# Altium PCB PCB1.PcbDoc (part 2 of 2)
Units mm, origin at the board's own origin, x right, y up, seen from the top; angles counter-clockwise.
Board outline 152.4 x 101.6 mm, 2 copper layers (Top Layer, Bottom Layer); 186 components, 0 nets, 752 pads, 762 vias.
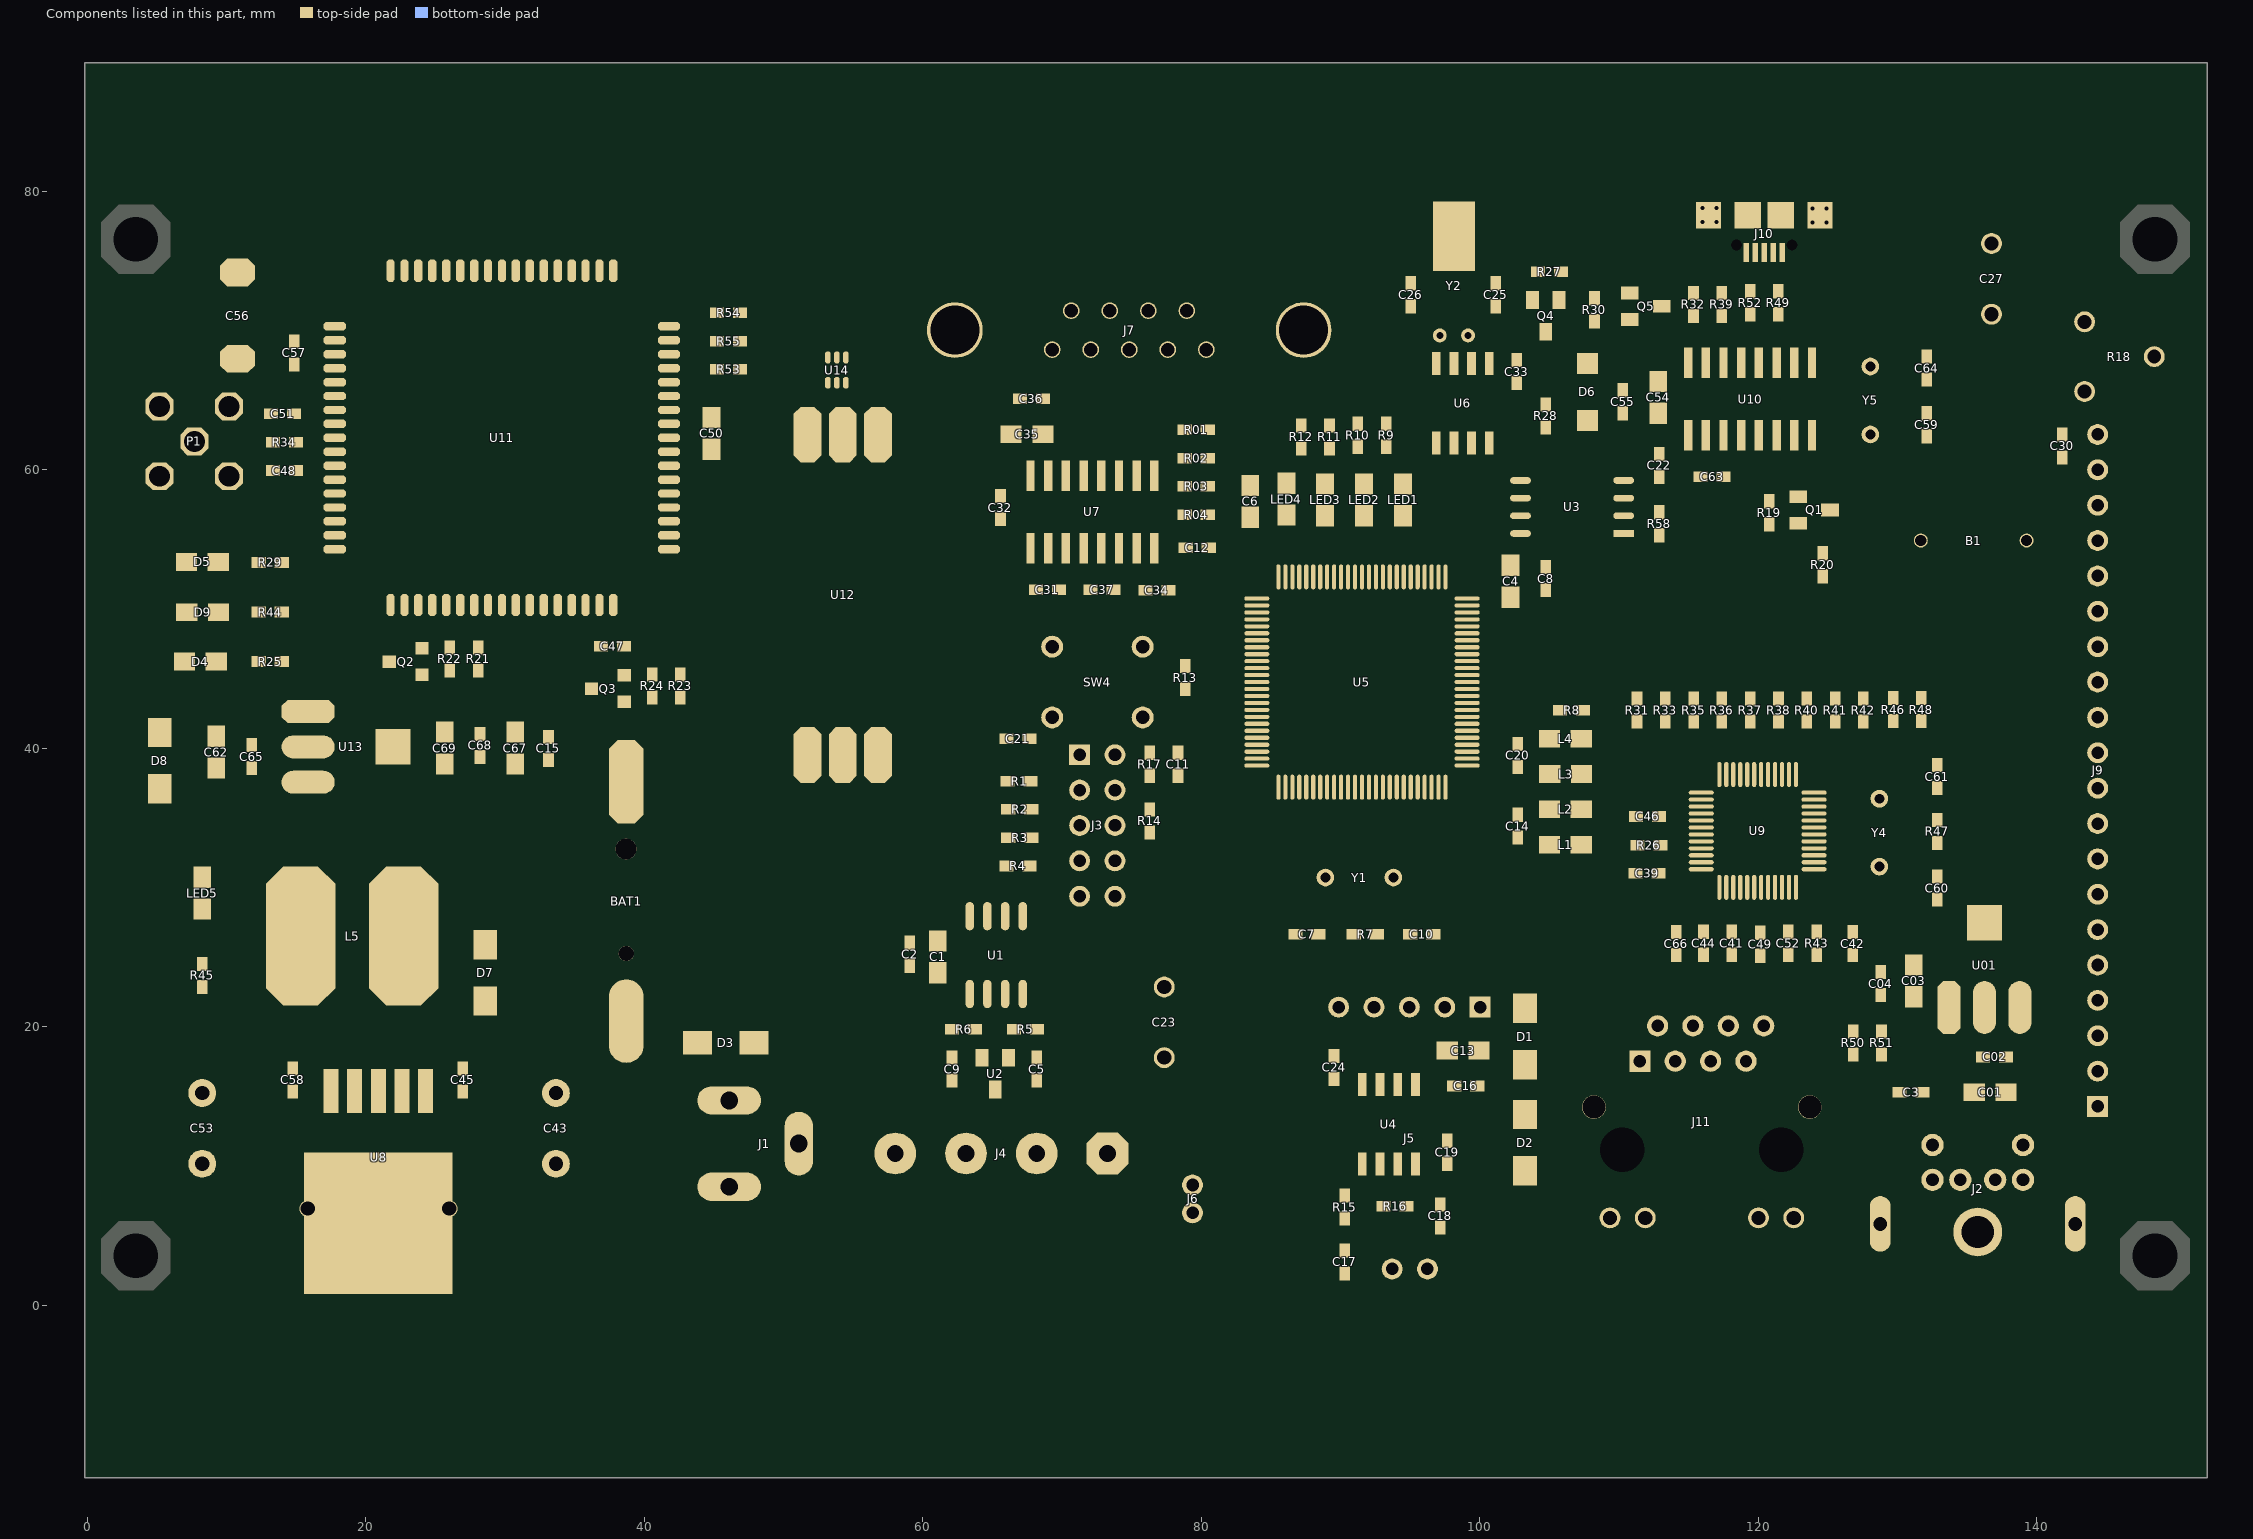
[diagram p2: the components of this part, seen from the top]

## Via types
v1: diameter 0.5, hole 0.3, Top Layer to Bottom Layer, tented both sides, 749 vias
v2: diameter 0.4, hole 0.3, Top Layer to Bottom Layer, tented both sides, 8 vias
v3: diameter 1, hole 0.7, Top Layer to Bottom Layer, tented both sides, 5 vias

## Nets (pads, with @x,y where several pads share a name; then routed paths per layer and width w, separated by ;. In a path a pad name is that pad's centre, name@x,y a point inside that pad or via, vN(x,y) a via of type N, cw(c..) or ccw(c..) an arc to the next point about the centre after c; other vN are vias at no path point) (continued)
copper on no net: | length 4498
  Top Layer w0.254: 28.105,47.282 30.214,47.282 35.65,41.846 43.829,41.846 46.775,44.793 v1(69.838,44.793) ; 29.771,50.28 v1(29.771,52.235) ; 30.771,50.28 30.771,52.106 31.484,52.819 38.673,52.819 41.75,49.742 83.98,49.742 ; v1(31.865,52.26) 38.52,52.26 41.539,49.242 83.98,49.242 ; 42.587,45.288 42.854,45.555 v1(70.804,45.555) ; 53.821,68.06 53.821,69.377 ; 63.361,27.928 63.361,30.017 63.682,30.338 67.174,30.338 69.813,27.699 80.71,27.699 81.497,28.486 81.497,40.475 82.264,41.242 83.98,41.242 ; 67.171,27.928 68.01,27.089 81.167,27.089 82.005,27.927 82.005,40.068 82.679,40.742 83.98,40.742 ; 72.81,59.555 72.81,57.581 73.482,56.909 79.106,56.909 ; 73.794,34.442 74.289,33.947 76.29,33.947 80.303,33.947 80.938,34.582 80.938,43.472 81.708,44.242 83.98,44.242 ; 74.08,59.555 74.08,57.911 74.482,57.509 77.017,57.509 77.535,58.026 77.535,60.414 77.943,60.822 78.799,60.822 ; 75.782,42.202 75.782,40.17 76.29,39.662 ; 78.649,56.909 78.799,56.758 78.799,56.534 ; v1(78.83,42.761) 78.83,44.234 ; v1(80.354,35.42) v1(80.354,46.418) ; 80.45,56.758 81.651,56.758 v1(81.726,56.832) ; 80.45,60.822 80.499,60.871 v1(81.624,60.871) ; 80.474,58.814 v1(82.208,58.814) ; 80.525,62.928 v1(81.649,62.928) ; v1(82.05,50.742) 83.98,50.742 ; v1(82.582,39.638) 82.978,39.242 83.98,39.242 ; v1(82.626,50.242) 83.98,50.242 ; v1(82.834,43.742) 83.98,43.742 ; v1(83.631,54.394) 84.901,54.394 85.53,53.765 85.53,52.292 ; 83.98,35.979 83.98,38.742 ; 83.98,41.742 v1(85.558,41.742) ; 83.98,42.242 86.312,42.242 87.466,43.396 87.466,47.663 v1(86.856,48.273) ; 83.98,42.742 85.866,42.742 86.856,43.733 v1(86.856,47.358) ; 85.279,55.238 85.279,54.741 86.03,53.99 86.03,52.292 ; 85.53,37.192 85.53,39.402 v1(87.034,40.907) ; v1(85.536,49.67) 85.608,49.742 99.08,49.742 ; 86.03,37.192 86.03,39.14 v1(86.882,39.992) ; 86.11,56.737 86.11,55.013 86.374,54.75 90.997,54.75 91.53,54.216 91.53,52.292 ; v1(86.171,49.085) 86.327,49.242 99.08,49.242 ; 86.53,37.192 86.53,38.828 v1(87.771,40.068) ; 87.03,37.192 87.03,38.515 v1(87.644,39.129) ; 87.03,52.292 87.03,50.995 87.568,50.457 v1(88.558,50.457) ; 87.53,37.192 87.53,38.202 v1(88.533,39.205) ; 88.53,52.292 v1@88.53,53.556 ; 88.882,56.68 88.882,55.613 89.238,55.258 91.225,55.258 92.03,54.453 92.03,52.292 ; 89.03,52.292 v1@89.03,54.216 ; 90.03,37.192 90.03,39.886 ; v1(90.03,50.965) 90.03,52.292 ; v1@90.53,35.766 90.53,37.192 ; v1(90.53,50.355) 90.53,52.292 ; 90.936,26.639 88.396,26.639 88.904,27.147 88.904,30.703 91.03,32.829 91.03,37.192 ; 91.03,52.292 91.03,50.906 91.555,50.381 v1(97.474,50.381) ; 91.53,37.192 91.53,32.957 93.784,30.703 93.784,27.855 95,26.639 92.587,26.639 ; 91.682,56.68 91.682,55.436 92.53,54.588 92.53,52.292 ; 92.03,37.192 v1(92.03,38.494) 92.03,45.928 v1(94.603,48.501) ; 93.03,52.292 93.03,55.228 94.482,56.68 ; 93.53,52.292 93.53,54.413 94.248,55.131 95.162,55.131 96.864,56.832 96.864,61.902 ; v1@94.03,35.877 94.03,37.192 ; 94.03,52.292 94.03,54.1 94.603,54.673 95.416,54.673 98.134,57.391 98.134,61.902 ; v1@94.53,35.217 94.53,37.192 ; 94.53,52.292 94.53,53.889 94.883,54.242 95.696,54.242 99.404,57.95 99.404,61.902 ; 95.03,36.948 95.03,34.613 96.077,33.566 102.706,33.566 ; 95.042,71.727 95.042,71.71 97.118,69.634 98.134,68.618 98.134,67.602 ; 95.53,37.192 95.53,34.951 96.254,34.226 101.715,34.226 102.706,35.217 ; 96.03,37.192 96.03,35.365 96.585,34.811 100.166,34.811 102.706,37.351 102.706,38.646 ; 96.03,52.292 96.03,53.839 101.411,59.22 102.916,59.22 ; 96.53,37.192 v1(96.53,38.494) ; 96.53,52.292 v1(96.53,53.552) ; v1(96.839,35.369) 99.785,35.369 101.309,36.893 101.309,40.043 101.563,40.297 102.706,40.297 ; 97.03,37.192 v1(97.03,39.338) ; 97.03,52.292 97.03,53.874 101.106,57.95 102.916,57.95 ; v1(97.245,40.043) 97.546,39.742 99.08,39.742 ; v1@97.296,40.742 99.08,40.742 ; v1@97.296,41.742 99.08,41.742 ; 97.475,21.396 97.53,21.451 ; 97.53,37.192 97.53,36.39 97.882,36.038 v1(99.482,36.038) ; 97.53,52.292 v1(97.53,53.525) ; v1(97.855,42.71) 97.575,42.989 97.575,43.853 97.964,44.242 99.08,44.242 ; v1(97.859,40.242) 99.08,40.242 ; v1@97.86,41.242 99.08,41.242 ; 98.484,38.742 99.08,38.742 98.871,38.533 v1(98.871,36.638) ; 99.08,39.242 100.478,39.242 100.499,39.263 ; 99.08,43.242 100.647,43.242 101.538,44.132 108.015,44.132 109.081,45.199 135.624,45.199 137.148,43.675 137.148,33.541 141.212,29.477 141.212,14.084 140.196,13.068 138.622,13.068 137.656,12.103 137.656,9.651 137.001,8.996 ; 99.08,43.742 100.258,43.742 101.182,44.666 107.634,44.666 108.853,45.885 135.878,45.885 137.707,44.056 137.707,33.871 141.822,29.756 141.822,13.525 139.793,11.496 139.001,11.496 ; 99.08,45.242 107.372,45.242 108.65,46.52 136.31,46.52 138.876,43.955 138.876,34.988 144.362,29.502 ; 99.08,45.742 107.084,45.742 108.421,47.079 128.639,47.079 ; 99.08,46.242 106.721,46.242 108.065,47.587 131.408,47.587 ; 99.08,46.742 106.357,46.742 107.761,48.146 137.631,48.146 141.111,44.666 141.111,40.373 144.362,37.122 ; 99.08,47.242 105.957,47.242 107.42,48.704 138.037,48.704 141.822,44.92 141.822,42.202 144.362,39.662 ; 99.08,47.742 105.551,47.742 107.072,49.263 138.52,49.263 142.457,45.326 142.457,44.107 144.362,42.202 ; 99.08,48.242 105.094,48.242 106.597,49.746 139.206,49.746 144.21,44.742 144.362,44.742 ; 99.08,48.742 104.687,48.742 106.225,50.28 140.043,50.28 143.041,47.282 144.362,47.282 ; 99.08,50.242 100.686,50.242 100.982,50.538 ; 99.404,67.602 99.404,69.38 99.15,69.634 99.15,69.739 101.138,71.727 ; v1(104.225,58.961) 104.225,62.517 104.738,63.03 ; v1(104.484,42.71) 105.754,42.71 ; v1(105.017,58.915) 105.017,61.735 106.821,63.538 107.718,63.538 ; 107.278,38.118 107.298,38.138 ; v1(107.532,58.331) 107.532,56.096 108.218,55.41 110.326,55.41 109.589,55.41 ; v1(108.294,58.356) 108.294,57.163 108.777,56.68 110.326,56.68 109.564,56.68 ; 109.339,6.264 109.339,5.267 110.555,4.051 124.118,4.051 126.81,6.743 126.81,17.997 126.81,17.641 ; v2(109.691,20.079) 109.691,36.081 110.41,36.799 115.895,36.799 ; 111.284,41.898 111.284,39.841 111.767,39.358 118.447,39.358 118.695,39.109 118.695,38.099 ; 111.489,17.514 110.123,18.88 110.123,35.903 110.519,36.299 115.895,36.299 ; 111.875,6.264 113.402,4.737 123.178,4.737 125.668,7.226 125.668,31.686 125.055,32.299 123.995,32.299 ; 112.833,31.001 113.672,31.001 114.47,31.799 115.895,31.799 117.421,31.799 118.195,31.025 118.195,29.999 118.195,28.456 116.55,26.81 116.059,26.81 ; 112.882,34.038 113.482,34.038 114.721,32.799 115.895,32.799 ; 112.891,35.299 114.314,35.299 ; 112.96,33.033 113.773,33.033 114.507,32.299 115.895,32.299 ; 113.316,41.263 113.316,41.898 113.316,40.476 114.002,39.79 118.777,39.79 119.195,39.371 119.195,38.099 ; 115.348,41.517 115.348,41.898 115.348,40.679 115.729,40.298 119.006,40.298 119.695,39.608 119.695,38.099 ; 115.895,34.299 v1(117.221,34.299) ; 115.895,34.799 v1(117.682,34.799) ; 115.895,35.299 114.314,35.299 ; 115.895,35.799 117.743,35.799 117.982,36.038 ; 116.227,62.462 v1(116.227,64.419) ; 116.421,38.099 117.195,38.099 117.195,36.725 117.582,36.338 ; 116.482,28.438 117.482,28.438 117.695,28.651 117.695,29.999 ; 117.082,33.299 115.895,33.299 114.921,33.299 114.314,33.906 114.314,35.299 ; 117.37,71.031 118.767,69.634 118.767,67.662 ; 117.422,31.801 117.422,33.259 ; 117.497,59.474 118.018,59.474 118.767,60.223 118.767,62.462 ; 117.497,62.462 v1(117.497,63.97) ; 117.63,41.648 117.38,41.898 117.38,41.212 117.786,40.806 119.209,40.806 119.387,40.628 119.59,40.425 120.195,39.819 120.195,38.099 ; 118.091,26.81 118.091,27.623 119.195,28.727 119.195,29.999 119.195,32.799 ; v1(118.482,31.938) 118.695,31.725 118.695,29.999 ; 119.402,71.158 119.402,70.718 v1(120.282,69.838) ; 119.402,72.809 119.402,73.458 120.418,74.474 120.418,75.595 ; 119.412,41.898 119.412,41.263 120.695,39.98 120.695,38.099 120.695,39.625 ; 120.003,6.264 120.003,7.378 121.045,8.42 123.966,8.42 125.236,9.69 125.236,30.899 124.835,31.299 123.995,31.299 ; 120.037,62.462 120.037,63.993 v1(120.282,64.238) ; 120.123,26.739 120.123,28.03 120.695,28.602 120.695,29.999 ; v1(120.182,31.738) 120.195,31.725 120.195,29.999 ; v1(120.982,69.838) 121.434,70.29 121.434,71.158 ; 121.068,75.595 121.068,73.175 121.434,72.809 ; v1(121.082,64.238) 121.307,64.013 121.307,62.462 ; 121.195,29.999 121.195,32.799 ; 121.195,39.363 121.195,38.099 121.195,41.649 121.444,41.898 ; 121.695,29.999 121.695,28.235 122.155,27.776 122.155,26.81 ; 121.695,38.099 121.695,40.143 123.451,41.898 123.476,41.898 ; 121.782,34.238 122.721,33.299 123.995,33.299 ; 122.195,29.999 122.195,28.802 124.187,26.81 ; 122.195,38.099 122.195,39.83 123.019,40.653 125,40.653 125.508,41.161 125.508,41.898 ; 122.482,32.799 123.995,32.799 125.236,32.799 ; v2(122.559,36.299) 123.995,36.299 ; 122.577,62.462 122.577,63.533 126.446,67.402 128.038,67.402 128.746,68.11 132.102,68.11 ; v2(122.588,35.299) 123.995,35.299 ; 122.695,38.831 122.695,38.099 122.695,39.416 123.425,40.145 v2(124.448,40.145) 127.108,40.145 127.54,40.577 127.54,41.898 ; v2(122.823,35.799) 123.995,35.799 ; v2(122.859,34.799) 123.995,34.799 125.369,34.799 125.66,35.091 125.66,38.647 126.143,39.129 130.766,39.129 131.706,40.069 131.706,41.937 131.706,42.127 ; 123.847,62.462 123.847,62.803 125.782,64.738 127.382,64.738 128.038,64.082 128.038,62.522 128.165,62.395 132.102,62.395 ; 123.995,33.799 127.993,33.799 128.683,33.11 ; 123.995,34.299 128.023,34.299 128.683,34.96 ; 123.995,36.799 v2(123.995,37.325) 123.995,39.09 124.543,39.637 128.708,39.637 129.674,40.603 129.674,41.937 129.674,42.127 ; 126.81,19.648 128.842,19.648 ; v2(127.903,15.989) 128.842,16.929 128.842,17.997 ; 128.683,31.484 128.683,33.11 ; 128.683,36.364 128.683,34.96 ; 131.332,47.079 128.639,47.079 ; 132.849,30.773 132.849,33.186 132.772,33.11 128.683,33.11 ; 132.849,37.123 132.849,34.837 132.726,34.96 128.683,34.96 ; 133.364,47.587 131.408,47.587 ; 144.362,32.042 139.663,36.741 139.663,44.056 136.64,47.079 128.639,47.079 ; 144.362,34.582 140.4,38.544 140.4,44.336 137.148,47.587 131.408,47.587
  Top Layer w0.265: 131.823,66.738 132.102,66.459 132.102,64.046
  Top Layer w0.3: 46.871,67.192 46.953,67.11 54.229,67.11 54.471,67.352 54.471,68.06
  Top Layer w0.4: 41.771,66.28 43.815,66.28 44.407,65.688 53.007,65.688 53.171,65.852 53.171,66.231 53.167,66.231 ; 51.647,62.558 51.701,62.504 51.701,65.682 ; 53.821,66.231 v1(53.821,65.088) 53.821,62.924 ; 53.857,62.888 53.821,62.924 ; 53.957,62.788 53.821,62.924 ; 54.241,62.504 54.241,64.154 ; 54.471,66.231 54.471,65.624 55.014,65.081 56.781,63.314 56.781,62.504 ; 54.735,68.06 54.471,68.06 57.535,68.06 58.707,66.888 v1(58.707,62.7) ; 56.781,39.504 58.023,39.504 58.707,40.188 v1(58.707,41.516)
  Top Layer w0.5: 6.973,46.216 6.973,53.232 ; 7.679,62.02 7.735,61.964 ; 8.243,22.848 8.243,15.228 8.356,15.341 14.751,15.341 14.751,13.144 15.307,12.588 18.707,12.588 19.191,13.072 19.191,15.376 ; 9.251,40.85 11.156,40.85 11.791,40.215 ; 9.259,46.216 12.307,46.216 ; 9.395,53.368 9.435,53.328 12.307,53.328 ; 9.423,49.772 12.307,49.772 ; 13.958,46.216 14.235,46.216 20.707,52.688 23.671,52.688 24.771,51.588 24.771,50.28 ; 13.958,49.772 16.191,49.772 21.307,54.888 21.307,69.288 20.315,70.28 17.771,70.28 ; 13.958,53.328 13.958,55.439 14.799,56.28 17.771,56.28 ; 14.751,16.992 16.603,16.992 17.491,16.104 17.491,15.376 ; 21.673,46.216 21.771,46.314 21.771,50.28 ; 24.023,45.266 27.74,45.266 28.055,45.581 ; 24.023,47.166 24.089,47.232 26.023,47.232 ; 26.943,16.992 26.943,20.212 28.563,21.832 ; 36.205,44.272 36.771,44.838 36.771,50.28 ; 38.523,47.32 38.555,47.288 38.555,45.222 38.621,45.288 40.555,45.288 ; 38.555,43.322 42.272,43.322 42.587,43.637 ; 38.698,37.596 41.864,34.43 59.653,34.43 61.837,36.614 v1@61.837,39.637 ; 41.771,62.28 43.115,62.28 43.939,61.456 44.819,61.456 ; 41.771,65.28 43.281,65.28 44.819,63.742 ; 41.771,67.28 45.132,67.28 45.22,67.192 ; 41.771,68.28 44.276,68.28 45.22,69.224 ; 41.771,69.28 43.244,69.28 45.22,71.256 ; 46.871,69.224 v1(50.307,69.224) ; 46.871,71.256 v1(48.375,71.256) ; 65.571,56.447 68.619,56.447 69,56.066 69,54.355 ; 66.079,37.63 66.13,37.579 ; 66.13,33.566 66.13,35.598 66.13,37.579 ; 67.654,31.534 69.826,29.362 71.254,29.362 ; 67.654,40.678 68.798,40.678 69.282,41.162 69.282,42.202 ; 67.73,54.355 67.73,51.748 68.111,51.367 ; 67.73,37.63 70.606,37.63 71.254,36.982 ; 67.781,33.566 69.59,33.566 71.254,31.902 ; 68.619,65.083 68.619,62.543 69,62.162 69,59.555 ; 69.762,51.367 70.27,51.875 70.27,54.355 ; 70.27,59.555 70.27,63.183 74.817,67.73 74.817,68.618 ; 71.254,39.522 70.77,39.038 66.482,39.038 66.13,38.686 66.13,37.579 ; 71.54,54.355 71.54,51.875 72.048,51.367 ; 71.54,59.555 71.54,61.685 77.585,67.73 77.585,68.618 ; 72.81,54.355 72.81,52.992 73.699,52.103 73.699,51.367 ; 74.08,54.355 74.08,53.17 75.731,51.519 75.731,51.367 ; 78.799,56.758 78.799,58.79 ; 78.799,60.822 78.799,62.854 ; 80.532,54.394 v1(83.631,54.394) 83.631,56.451 83.504,56.578 ; 86.11,59.023 87.168,60.081 87.168,61.515 ; 88.882,58.966 89.2,59.284 89.2,61.515 ; 89.855,21.396 91.705,19.546 94.095,19.546 95.365,18.276 95.365,15.848 ; 91.232,61.642 91.232,59.416 91.682,58.966 ; 93.264,61.642 93.264,60.184 94.482,58.966 ; 93.264,63.293 93.264,65.5 93.664,65.9 100.039,65.9 100.674,66.535 ; 99.81,15.736 99.81,18.149 99.937,18.276 ; 100.674,61.902 v1(100.674,65.265) ; 100.674,67.602 100.674,66.535 ; 101.138,73.378 102.061,73.378 102.634,72.805 102.634,67.862 ; 102.198,50.838 104.23,50.838 104.738,51.346 ; 102.634,66.211 100.998,66.211 100.674,66.535 ; 102.706,33.566 103.214,33.058 104.992,33.058 ; 102.706,35.217 103.087,35.598 104.992,35.598 ; 102.706,38.646 103.214,38.138 105.012,38.138 ; 102.706,40.297 103.087,40.678 104.992,40.678 ; 103.781,72.174 103.781,73.825 104.162,74.206 ; 104.67,64.681 104.67,69.824 104.733,69.888 ; 105.686,72.174 108.099,72.174 108.226,72.301 ; 105.813,74.206 v1(107.25,74.206) ; 107.718,67.622 109.434,69.338 112.482,69.338 113.052,69.908 113.052,71.729 113.052,72.308 113.426,72.682 115.338,72.682 ; 108.226,70.65 v1(109.482,70.65) 110.639,70.65 110.766,70.777 ; 110.258,64.046 112.798,64.046 112.798,61.193 ; 110.258,65.697 110.893,66.332 112.798,66.332 113.627,66.332 114.957,67.662 v1(114.957,69.638) 114.957,70.65 115.338,71.031 ; 110.326,55.41 112.739,55.41 112.866,55.283 ; 110.326,57.95 112.866,57.95 ; 110.326,59.22 110.326,60.719 110.732,61.125 112.866,61.125 114.906,61.125 ; 110.766,72.682 112.122,74.038 117.082,74.038 117.37,73.75 117.37,72.682 ; 112.866,56.934 112.866,57.95 ; 112.866,59.474 112.866,57.95 ; 114.103,26.788 114.126,26.81 116.059,26.81 ; 114.72,52.997 114.72,57.34 114.111,57.95 112.866,57.95 ; 114.957,62.462 114.957,60.363 115.846,59.474 ; 115.299,20.054 115.299,21.216 116.092,22.009 v1(123.89,22.009) ; 117.082,33.299 117.857,33.299 118.357,32.799 119.195,32.799 121.195,32.799 122.482,32.799 ; v1(117.497,65.923) 117.497,67.662 ; v1(119.546,56.07) 120.791,56.07 ; 120.791,57.721 121.123,58.053 122.851,58.053 ; 124.626,52.337 130.748,52.337 131.662,53.251 131.662,54.47 ; 124.626,53.988 125.137,54.498 125.137,57.101 ; 125.236,32.799 125.49,32.799 ; 130.138,15.278 130.138,13.373 ; 132.501,1.868 132.501,8.996 131.024,8.996 130.138,9.882 130.138,13.373 ; 137.783,15.278 137.783,14.211 136.92,13.348 130.163,13.348 130.138,13.373
  Top Layer w0.6: 14.974,61.964 15.29,62.28 17.771,62.28
  Top Layer w0.7: 7.735,61.964 13.323,61.964 13.323,59.932 ; 14.847,63.996 14.974,63.869 14.974,61.964 ; 59.043,24.372 59.551,23.864 61.075,23.864 ; 59.043,26.023 60.948,26.023 61.075,26.15 61.457,25.768 74.411,25.768 77.331,22.848 ; 62.091,19.8 62.091,17.768 63.507,17.768 ; 63.097,10.888 63.507,11.298 63.507,17.768 ; 63.742,19.8 64.631,20.689 64.631,22.34 ; 64.25,17.768 63.507,17.768 ; 64.631,25.768 64.631,27.928 ; 65.901,22.34 65.901,20.435 66.536,19.8 ; 66.155,17.768 67.007,17.768 ; 68.177,10.888 66.907,12.158 66.907,17.668 67.007,17.768 ; 68.187,19.8 68.187,17.768 67.007,17.768 ; 73.794,39.522 75.305,38.011 76.29,38.011 ; 76.29,35.598 v1(76.29,36.792) 76.29,38.011 ; 78.322,38.011 76.29,38.011 ; 79.363,6.624 80.409,7.67 86.616,7.67 88.66,9.713 88.688,9.713 94.095,15.121 94.095,15.848 ; 79.363,8.624 86.221,8.624 91.555,13.958 91.555,15.848 ; 90.285,2.274 93.373,2.274 93.695,2.596 ; 90.285,3.925 90.285,6.211 ; 90.285,7.862 91.047,7.862 91.555,8.37 91.555,10.148 ; 92.825,10.148 92.825,7.354 93.079,7.1 ; 92.825,15.848 92.825,16.752 ; 94.095,10.148 94.095,11.672 94.603,12.18 97.27,12.18 97.651,11.799 ; 94.73,7.1 97.016,7.1 97.143,7.227 ; 95.365,10.148 97.397,10.148 ; 96.235,2.596 97.143,3.504 97.143,5.576 ; 97.651,18.276 97.651,16.244 98.159,15.736 98.159,12.307 98.032,12.18 ; 99.125,51.016 99.125,51.93 100.318,53.124 102.198,53.124 ; 102.916,55.41 102.916,53.124 104.611,53.124 104.738,52.997 114.72,52.997 121.908,52.997 122.851,53.939 122.851,56.148 ; 107.278,40.678 107.278,42.583 107.405,42.71 ; 111.182,31.001 111.182,35.057 111.215,35.09 ; 111.284,43.549 113.316,43.549 v1(114.339,43.549) 115.05,43.549 ; 114.103,25.137 120.123,25.137 124.187,25.137 ; 117.38,43.549 119.412,43.549 121.444,43.549 123.476,43.549 125.508,43.549 ; 125.49,32.799 126.104,32.799 126.782,32.121 126.782,26.788 ; 127.579,43.588 v1(128.614,43.588) 129.674,43.588 131.706,43.588 134.05,43.588 134.989,42.648 134.989,28.714 136.235,27.468 ; 128.782,22.263 129.673,21.372 133.695,21.372 ; 131.789,15.278 135.497,15.278 135.497,17.183 136.132,17.818 ; 131.839,15.228 131.882,15.271
  Top Layer w1: 8.243,24.499 8.243,28.436 ; 15.853,40.087 21.949,40.087 23.177,38.86 25.655,38.86 30.735,38.86 ; 17.491,15.376 17.491,17.372 18.307,18.188 19.907,18.188 20.891,17.204 20.891,15.376 20.891,5.88 ; 22.591,15.376 22.591,18.204 ; 28.563,21.832 29.999,20.396 38.698,20.396 ; 66.815,64.93 66.333,64.448 66.333,62.543 v3(66.333,60.587) 67.4,59.52 ; 69.282,42.202 75.782,42.202 ; 71.254,39.522 73.794,39.522 ; 77.331,22.848 82.284,17.895 89.523,17.895 92.19,17.895 92.825,17.26 92.825,16.752 ; v3(83.656,28.156) v1(83.656,36.843) ; v1(84.799,64.097) 86.237,64.097 87.168,63.166 89.2,63.166 94.315,63.166 v1(95.162,62.319) ; 99.937,18.276 99.937,21.318 100.015,21.396 ; 103.239,9.64 v3(103.239,7.1) 103.239,3.721 105.144,1.816 138.52,1.816 139.612,2.908 139.612,6.769 143.219,10.376 147.486,10.376 149.798,12.687 149.798,63.182 144.819,68.161 139.739,68.161 136.742,71.158 ; 104.738,52.997 105.932,54.191 v1@105.932,61.227 ; 107.278,35.598 107.278,38.118 ; 115.299,20.054 116.569,18.784 116.569,17.514 ; 122.035,74.993 v1(125.21,74.993) 132.907,74.993 136.742,71.158 ; 126.81,19.648 126.81,22.034 126.81,22.618 128.444,24.252 ; 127.014,26.788 127.864,26.788 128.614,26.038 128.614,24.422 131.154,24.422 133.364,26.632 135.398,26.632 136.235,27.468 136.235,21.372 ; 137.783,15.278 137.783,17.818 v3(138.774,18.809) 138.774,21.372 ; 144.362,16.802 145.937,16.802 147.181,18.047 147.181,58.763 145.962,59.982 144.362,59.982 140.171,59.982 136.742,63.411 136.742,71.158
  Top Layer w1.5: 5.195,41.122 1.807,44.51 1.807,66.388 3.379,67.96 10.783,67.96 ; 15.853,37.547 15.853,35.532 16.829,34.557 30.011,34.557 35.752,28.816 57.469,28.816 59.805,26.479 ; 24.607,15.228 33.007,15.228 ; 33.643,15.228 41.172,15.228 43.817,17.873 43.817,18.834 ; 46.089,14.697 47.867,16.475 47.867,18.834 ; 100.015,21.396 103.153,21.396 ; 103.239,13.69 103.239,17.26
  Top Layer w2: 8.243,15.228 6.767,15.228 4.607,17.388 4.607,35.388 6.766,37.547 14.947,37.547 ; 8.356,15.341 15.315,22.3 15.315,26.5 ; 10.783,67.96 12.463,66.28 17.407,66.28 ; 22.591,18.204 22.591,26.376 22.715,26.5 23.333,25.882 28.307,25.882
  Bottom Layer w0.254: v1@29.796,52.26 v1(31.865,52.26) ; v1(69.838,44.793) 88.396,44.793 90.53,46.926 v1(90.53,50.355) ; v1(70.804,45.555) 88.203,45.555 90.03,47.382 v1(90.03,50.965) ; 71.254,29.362 67.667,29.362 67.019,30.01 67.019,47.282 67.019,49.365 68.396,50.742 v1(82.05,50.742) ; 71.254,31.902 72.512,33.16 79.897,33.16 80.354,33.617 v1(80.354,35.42) ; 71.254,34.442 68.518,34.442 67.527,35.433 67.527,46.52 67.527,49.124 68.645,50.242 v1(82.626,50.242) ; 71.254,36.982 72.505,38.233 72.505,42.71 73.537,43.742 v1(82.834,43.742) ; 75.782,38.494 v1(92.03,38.494) ; 78.83,42.456 78.83,42.202 79.29,41.742 v1(85.558,41.742) 87.006,41.742 v1(104.225,58.961) ; v1(80.354,46.418) 87.517,46.418 88.558,47.46 v1(88.558,50.457) ; v1(81.624,60.871) 81.624,58.255 81.98,57.899 85.409,57.899 86.171,57.137 v1(86.171,49.085) ; v1(81.649,62.928) 86.602,62.928 87.491,62.039 87.491,47.993 v1(86.856,47.358) ; v1(81.726,56.832) 84.977,56.832 85.536,56.274 v1(85.536,49.67) ; v1(82.208,58.814) 86.425,58.814 86.856,58.382 v1(86.856,48.273) ; v1(86.882,39.992) 93.689,46.799 140.171,46.799 143.194,49.822 144.362,49.822 ; v1(87.034,40.907) 93.562,47.434 139.612,47.434 144.362,52.184 144.362,52.362 ; v1(87.644,39.129) 94.222,45.707 139.815,45.707 141.111,44.412 141.111,25.946 142.635,24.422 144.362,24.422 ; v1(87.771,40.068) 93.943,46.241 140.146,46.241 141.72,44.666 141.72,28.003 142.762,26.962 144.362,26.962 ; v1(88.533,39.205) 94.578,45.25 139.434,45.25 140.603,44.082 140.603,23.939 142.66,21.882 144.362,21.882 ; v1(88.533,53.556) 88.533,62.674 90.277,64.419 v1(116.227,64.419) ; v1(89.041,54.216) 89.041,62.344 90.666,63.97 115.973,63.97 116.001,63.942 117.469,63.942 v1(117.497,63.97) ; 89.855,21.396 90.819,22.36 90.819,30.239 94.045,33.464 v1(94.045,35.877) ; v1(94.603,48.501) v1(105.017,58.915) ; 94.935,21.396 98.871,25.332 v1(98.871,36.638) ; v1(96.53,38.494) 96.784,38.748 119.597,38.748 120.461,37.884 120.461,34.988 121.553,33.896 123.839,33.896 124.448,34.506 v2(124.448,40.145) ; v1(96.53,53.552) 97.067,54.089 97.067,60.084 97.804,60.82 107.456,60.82 108.294,59.982 v1(108.294,58.356) ; v1(96.839,35.369) 96.686,35.217 v1@94.53,35.217 ; v1(97.03,39.338) 120.048,39.338 120.588,38.798 120.867,38.519 120.867,35.192 121.705,34.353 123.585,34.353 123.995,34.764 v2(123.995,37.325) ; v1@97.296,40.742 120.752,40.742 121.705,39.789 121.705,35.75 122.156,35.299 v2(122.588,35.299) ; v1(97.296,41.745) 121.223,41.745 122.559,40.408 v2(122.559,36.299) ; v1(97.474,50.381) 103.163,56.07 v1(119.546,56.07) ; 97.475,21.396 97.475,22.772 99.468,24.765 v1@99.468,36.038 ; 97.53,21.451 97.778,21.699 ; v1(97.53,53.525) 97.53,59.759 98.083,60.312 106.999,60.312 107.532,59.779 v1(107.532,58.331) ; v1(97.855,41.237) 120.969,41.237 122.112,40.094 122.112,36.143 122.382,35.872 122.75,35.872 v2(122.823,35.799) ; v1(97.855,42.71) v1(104.484,42.71) ; v1(97.859,40.242) 120.588,40.242 121.273,39.556 121.273,35.485 121.959,34.799 v2(122.859,34.799) ; v2@109.716,20.054 112.759,20.054 ; 114.029,17.514 114.034,17.519 114.034,21.526 117.221,24.713 v1(117.221,34.299) ; v1(114.339,43.549) 114.339,42.981 114.821,42.499 128.043,42.499 128.614,43.07 v1(128.614,43.588) v1@128.614,43.641 ; v1(117.682,34.799) 117.698,34.784 117.698,20.195 117.839,20.054 ; v1(120.282,64.238) v1(120.282,69.838) ; v1(121.082,64.238) v1@121.082,69.738 ; 122.539,6.264 125.721,6.264 126.785,7.328 126.785,14.872 v2(127.903,15.989) ; v1@94.53,35.217 v1(94.527,35.217) 94.53,35.22 v1@94.53,35.217
  Bottom Layer w0.4: v1(48.375,71.256) 48.375,65.645 48.932,65.088 v1(53.821,65.088) ; v1@50.168,69.224 v1(50.307,69.224) 53.796,69.224 55.021,67.999 v1(55.021,65.088) ; v1(58.707,41.516) v1(58.707,62.7)
  Bottom Layer w0.5: v1@61.837,39.662 61.837,64.224 62.879,65.265 v1(100.674,65.265) ; 73.794,36.982 75.159,36.982 75.782,37.605 75.782,38.494 75.782,42.202 ; v1(76.29,36.792) v1@83.605,36.792 ; 79.973,64.071 79.973,54.927 80.506,54.394 v1(83.631,54.394) ; v1(83.656,36.843) 84.291,37.478 90.133,37.478 ; 89.701,37.478 90.133,37.478 ; v1(90.374,35.611) 90.374,37.236 90.133,37.478 ; v1(97.245,40.043) 95.264,40.043 92.698,37.478 ; v1(107.303,36.868) 106.694,37.478 92.698,37.478 ; 107.608,74.206 114.238,74.206 114.957,73.487 ; v1(109.482,70.65) 109.482,69.513 110.504,68.491 116.498,68.491 117.497,67.492 v1(117.497,65.923) ; v1(114.957,69.638) 114.957,73.487 ; v1(123.89,22.009) v1(126.785,22.009) ; v1(125.21,74.993) 115.812,74.993 114.957,74.138 114.957,73.487 ; 143.426,65.61 145.795,65.61 146.47,64.935 146.47,58.153 145.759,57.442 144.362,57.442 ; 144.362,19.342 146.14,19.342 147.308,20.51 147.308,66.992 148.426,68.11 ; 90.133,37.478 92.698,37.478
  Bottom Layer w1: 64.555,27.343 64.555,58.809 v3(66.333,60.587) 69.843,64.097 v1(84.799,64.097) ; 77.331,22.848 93.079,7.1 v3(103.239,7.1) ; v1(95.162,62.319) 105.348,62.319 105.881,61.785 v1@105.881,61.633 ; 143.426,70.61 142.315,70.61 140.704,68.999 140.704,61.709 142.432,59.982 144.362,59.982
  Bottom Layer w1.5: v3(28.208,37.681) 28.208,36.436 37.377,27.267 82.767,27.267 v3(83.656,28.156) ; 33.643,15.228 36.132,15.228 37.936,13.424 37.936,5.397 39.689,3.645 70.981,3.645 73.257,5.92 73.257,10.888
  other v1: 84.882,2.238 86.282,2.538 13.982,2.788 34.732,3.038 109.282,3.138 112.882,3.138 115.882,3.138 117.982,3.138 120.582,3.138 123.182,3.138 28.232,3.288 87.682,3.338 8.232,3.538 30.232,3.788 11.482,4.038 126.482,4.038 76.682,4.438 130.982,4.538 87.382,4.738 33.732,4.788 106.782,4.938 85.382,5.038 48.732,5.788 83.182,5.838 40.982,6.038 42.732,6.038 45.982,6.038 87.582,6.138 11.232,6.288 76.682,6.738 65.732,6.788 130.982,6.788 62.732,7.038 69.982,7.038 58.982,7.288 53.232,7.788 40.982,8.038 114.482,8.038 117.482,8.038 12.732,8.288 28.732,8.288 106.782,8.338 94.182,8.438 3.482,8.538 76.682,8.638 5.732,8.788 59.982,8.788 100.982,9.338 128.482,9.538 115.982,9.788 117.482,9.788 27.232,10.288 83.182,10.338 12.982,10.538 30.982,10.538 40.482,10.538 140.982,10.538 114.232,10.788 45.732,11.038 135.232,11.038 76.782,11.238 100.982,11.238 85.732,11.288 2.482,11.538 48.232,11.788 78.232,11.788 117.982,11.788 128.482,11.788 106.782,11.938 5.732,12.038 35.732,12.038 40.482,12.038 53.732,12.038 135.982,12.038 142.232,12.038 145.482,12.038 11.982,12.288 43.482,12.288 134.482,12.288 143.732,12.288 147.232,12.288 93.482,12.438 27.732,12.538 82.982,12.788 94.982,12.938 100.882,12.938 99.282,13.038 112.232,13.288 116.232,13.288 96.782,13.338 11.482,13.538 118.982,13.538 4.482,13.788 128.482,13.788 72.232,14.038 146.232,14.038 147.982,14.038 80.982,14.538 89.582,14.538 111.232,14.788 114.482,14.788 116.982,14.788 54.982,15.038 146.982,15.038 2.232,15.288 142.982,15.288 71.282,15.538 74.082,15.538 101.382,15.538 148.232,16.038 58.732,16.288 86.582,16.338 106.782,16.438 51.732,16.538 121.982,16.538 133.482,16.538 139.982,16.538 96.682,16.738 71.732,17.538 30.732,17.788 24.732,18.038 36.482,18.038 142.982,18.038 73.982,18.138 19.232,18.188 33.982,18.288 17.232,18.538 20.732,18.538 26.232,18.538 53.982,18.538 56.482,18.538 131.582,18.738 1.982,18.788 6.732,18.788 14.982,18.788 51.232,18.788 140.232,18.788 28.732,19.288 75.482,19.438 16.232,19.538 19.732,19.538 122.982,19.538 88.232,19.788 85.882,19.838 131.982,19.938 84.232,20.038 142.982,20.538 9.982,20.788 6.732,21.038 40.982,21.038 86.482,21.038 106.782,21.038 46.982,21.288 54.982,21.538 59.982,21.538 26.482,21.788 50.232,22.038 74.732,22.038 82.732,22.038 148.482,22.238 11.232,22.288 51.982,22.288 44.732,22.538 56.982,22.538 69.232,22.538 84.982,22.538 87.782,22.638 80.882,22.838 107.482,23.038 2.232,23.288 26.482,23.288 111.482,23.288 113.482,23.288 119.482,23.438 121.182,23.438 123.282,23.438 41.482,23.538 48.482,23.538 71.482,23.538 35.732,23.788 93.732,23.788 31.482,24.038 126.482,24.038 10.232,24.288 54.232,24.288 79.482,24.288 89.232,24.288 47.482,24.538 57.232,24.538 34.982,24.788 50.982,24.788 82.482,24.788 85.232,24.788 78.082,24.838 40.732,25.038 43.482,25.038 93.732,25.288 101.982,25.538 145.732,25.538 32.732,26.038 11.232,26.288 34.732,26.288 6.732,26.538 130.082,26.838 1.982,27.038 148.482,27.038 10.232,27.538 32.732,27.538 107.482,27.788 111.982,27.788 129.982,27.788 30.232,28.038 26.982,28.288 105.482,28.288 142.982,28.288 114.282,28.338 86.482,28.538 97.232,28.538 101.982,28.538 123.982,28.538 138.982,28.538 103.482,28.788 92.482,29.038 11.732,29.288 79.732,29.288 128.732,29.288 66.182,29.338 77.732,29.538 130.232,29.538 31.982,29.788 95.482,29.788 114.282,29.938 60.732,30.038 116.082,30.038 123.982,30.038 138.482,30.038 1.982,30.288 29.982,30.288 61.982,30.288 10.232,30.538 78.732,30.538 104.732,30.538 69.984,30.638 27.482,30.788 136.732,30.788 145.732,30.788 37.232,31.038 50.232,31.038 55.732,31.038 58.982,31.038 41.482,31.288 47.732,31.288 51.982,31.288 101.982,31.288 77.732,31.538 79.732,31.538 86.732,31.538 130.982,31.538 11.982,31.788 29.232,31.788 44.232,31.788 56.982,31.788 60.982,31.788 69.182,31.838 53.732,32.038 6.732,32.288 27.732,32.288 95.232,32.288 97.482,32.288 142.782,32.338 26.232,32.538 49.232,32.538 148.482,32.638 8.982,32.788 41.482,32.788 46.482,32.788 59.732,32.788 51.232,33.038 55.482,33.038 61.982,33.038 35.982,33.288 10.732,33.538 13.982,33.788 138.882,33.838 119.482,34.038 136.232,34.038 6.982,34.288 85.982,34.288 88.482,34.288 92.732,34.288 1.982,34.788 142.782,34.938 13.232,35.288 33.482,35.288 35.482,35.288 77.732,35.288 78.982,35.288 119.232,35.288 139.782,35.338 63.232,35.788 145.732,35.788 56.732,36.038 126.732,36.038 18.082,36.238 48.732,36.288 51.482,36.288 54.232,36.288 118.232,36.288 119.232,36.288 59.232,36.538 130.732,36.788 109.082,37.138 34.232,37.538 42.482,37.788 126.732,37.788 60.232,38.038 128.482,38.038 130.232,38.038 35.732,38.288 45.732,38.288 136.232,38.288 1.982,38.538 145.732,38.538 47.482,38.788 63.232,38.788 148.482,39.038 49.232,39.288 90.282,39.538 61.812,39.662 90.982,40.138 34.982,40.288 93.482,40.538 133.482,40.538 97.296,40.754 7.482,40.788 36.232,40.788 44.982,40.788 46.732,40.788 136.232,40.788 60.232,41.038 145.732,41.038 77.582,41.238 1.732,41.538 48.482,41.538 63.232,41.538 94.482,41.538 12.732,42.038 93.482,42.038 95.482,42.288 77.582,42.438 50.982,42.538 48.982,42.788 31.982,43.038 109.232,43.038 109.982,43.038 10.982,43.288 26.232,43.288 52.732,43.288 55.232,43.288 56.982,43.288 60.232,43.288 63.232,43.288 94.482,43.288 102.082,43.438 102.882,43.438 103.682,43.438 7.482,43.538 28.232,43.538 30.232,43.538 145.732,43.538 118.382,43.638 120.482,43.638 122.482,43.638 124.482,43.638 148.482,43.638 9.232,43.788 95.982,43.788 109.732,44.038 44.182,44.138 5.482,44.288 31.232,44.538 16.732,44.788 18.982,45.288 33.982,45.788 145.732,46.038 34.982,46.538 65.982,46.738 49.482,47.038 52.232,47.288 60.232,47.288 18.732,47.538 43.982,47.538 46.732,47.538 53.732,47.538 56.232,47.538 62.982,47.538 32.982,47.788 77.732,47.788 4.482,48.038 10.982,48.038 81.982,48.038 65.982,48.138 31.482,48.288 35.232,48.288 91.732,48.288 96.232,48.288 97.232,48.288 148.482,48.438 23.982,48.538 26.982,48.538 143.232,48.538 145.732,48.538 39.232,48.788 20.232,49.038 103.882,49.938 145.732,51.038 66.232,51.288 126.482,51.288 129.232,51.288 10.982,51.538 47.232,51.538 63.232,51.538 100.482,51.538 107.232,51.538 109.232,51.538 111.232,51.538 114.982,51.538 117.232,51.538 119.482,51.538 121.982,51.538 4.482,51.788 51.232,51.788 141.732,51.788 15.982,52.038 43.732,52.038 49.482,52.038 60.232,52.038 136.732,52.038 66.482,52.288 81.982,52.288 45.982,52.538 56.482,52.538 133.982,52.538 138.982,52.538 78.232,52.788 82.982,53.038 53.482,53.288 26.232,53.538 145.732,53.538 15.732,53.788 43.982,53.788 135.982,53.788 142.482,53.788 148.482,53.838 63.232,54.038 126.982,54.038 48.482,54.288 50.982,54.288 55.232,54.538 60.232,54.538 104.232,54.538 116.482,54.538 118.232,54.538 119.732,54.538 98.982,54.738 127.982,54.788 32.732,55.038 36.732,55.038 44.982,55.038 66.582,55.038 24.232,55.288 12.232,55.538 81.982,55.538 99.882,55.638 126.982,55.788 134.232,55.788 10.732,56.038 19.732,56.038 56.982,56.038 145.732,56.038 28.482,56.288 50.982,56.288 53.482,56.288 60.232,56.288 70.732,56.288 72.232,56.288 3.982,56.538 5.982,56.538 8.732,56.538 137.482,56.538 142.482,56.538 63.232,56.788 7.482,57.288 37.982,57.288 69.982,57.288 71.482,57.288 104.732,57.288 48.482,57.538 128.582,57.538 66.782,57.638 67.882,57.638 51.732,57.788 131.482,57.788 148.482,57.938 12.732,58.038 118.982,58.038 133.732,58.038 135.232,58.038 141.482,58.038 46.232,58.288 55.982,58.288 60.232,58.288 139.482,58.288 19.732,58.538 53.482,58.788 7.732,59.038 23.732,59.038 63.232,59.038 43.982,59.288 100.232,59.288 114.232,59.288 36.232,59.788 48.482,59.788 120.732,59.788 123.232,59.788 125.082,59.838 27.232,60.038 32.982,60.038 127.982,60.038 60.232,60.788 85.482,61.038 108.982,61.288 105.932,61.43 19.732,61.538 63.482,61.538 84.482,61.538 4.982,61.788 148.482,61.838 74.232,62.038 75.732,62.038 76.982,62.038 111.482,62.288 64.482,62.538 112.798,62.538 125.982,62.538 36.982,63.038 48.232,63.038 60.232,63.288 63.482,63.288 23.982,63.538 129.732,64.038 138.732,64.038 19.732,64.288 7.982,64.538 28.982,64.538 118.982,65.038 150.482,65.038 122.482,65.288 134.982,65.288 33.232,65.538 105.982,65.538 107.732,65.538 115.482,65.538 138.732,65.788 23.982,66.038 126.732,66.038 38.482,66.288 60.732,66.288 129.732,66.288 149.482,66.288 19.732,66.788 105.982,67.038 93.482,67.288 109.482,67.538 26.982,68.038 95.482,68.038 49.582,68.138 51.682,68.138 66.482,68.288 19.482,68.788 36.482,68.788 146.732,68.788 91.982,69.038 30.982,69.288 100.732,69.538 102.634,69.538 106.982,69.538 127.732,69.538 117.382,69.638 94.732,69.788 101.732,69.788 145.982,69.788 122.982,70.038 134.732,70.038 57.982,70.288 131.232,70.288 147.232,70.538 148.732,70.538 2.482,70.788 38.732,70.788 139.732,70.788 5.482,71.038 33.982,71.038 123.732,71.038 145.482,71.038 23.732,71.288 129.482,71.288 28.732,71.538 91.982,71.788 133.482,71.788 55.982,72.038 97.482,72.288 98.982,72.288 138.982,72.288 51.732,72.538 3.732,72.788 140.482,72.788 40.482,73.038 130.232,73.038 48.482,73.538 97.482,73.538 98.982,73.538 118.382,74.038 57.982,74.288 139.232,74.538 14.482,74.788 102.482,74.788 53.982,75.288 91.982,75.288 140.732,75.288 49.732,75.788 94.482,75.788 106.732,76.038 113.482,76.038 16.232,76.288 102.732,76.288 109.982,76.288 114.982,76.288 41.732,76.538 139.232,76.538 8.482,77.038 19.982,77.038 24.232,77.038 36.982,77.038 126.982,77.038 128.982,77.038 130.982,77.038 10.982,77.288 22.232,77.288 26.982,77.288 32.232,77.288 112.482,77.538 53.232,77.788 55.982,77.788 107.732,77.788 40.732,78.038 100.482,78.038 102.482,78.038 110.482,78.038 132.732,78.038 14.482,78.288 114.232,78.288 91.982,78.538

## Polygon pours and split planes (outlines as drawn)
no net on Bottom Layer "Top Layer-No Net" (solid, pour order 1000): 0.982,2.038 1.982,1.038 149.982,1.038 150.982,2.038 150.982,7.038 150.982,78.038 149.982,79.038 1.982,79.038 0.982,78.038
no net on Top Layer "Top Layer-No Net" (solid, pour order 1001): 0.982,2.038 1.982,1.038 149.982,1.038 150.982,2.038 150.982,10.038 150.982,78.038 149.982,79.038 1.982,79.038 0.982,78.038

## Other copper
Top Layer:
  region: 103.57,55.232 103.57,56.832 102.3,56.832 102.3,55.232
  region: 25.107,39.088 24.107,40.088 23.507,39.488 24.507,38.488
  region: 31.675,36.855 31.675,39.755 22.094,39.755 22.094,36.855
  region: 24.107,36.868 24.107,43.388 18.707,43.388 18.707,36.868
  region: 18.507,64.988 18.507,67.488 17.107,67.488 17.107,64.988
  region: 122.366,75.324 121.908,75.781 121.578,75.451 122.035,74.993
  region: 33.491,38.671 33.491,39.755 31.675,39.755 31.675,38.671

## Silkscreen, mask and mechanical layers (free items; w line width, h text height)
Top Overlay:
  lines w1: 87.682,29.238 95.182,29.238 ; 87.682,32.238 95.182,32.238 ; 126.582,61.138 126.582,68.638 ; 127.282,30.138 127.282,37.638 ; 129.382,61.238 129.382,68.738 ; 130.082,30.138 130.082,37.638
  text "Storage Cabinet V1.0" at 103.001,46.318 h2
  text "20141028" at 47.632,30.888 h2
  text "e_lin" at 50.157,27.588 h2
  text "1" at 143.082,14.038 h1 r90
  text "GND" at 56.732,13.413 h1
  text "CANL" at 61.457,13.413 h1
  text "CANH" at 66.282,13.413 h1
  text "12V" at 71.957,13.413 h1
  text "SPK" at 78.457,2.963 h1
  text "12VDC_IN" at 27.557,1.488 h2
Mechanical 1:
  lines w0.254: 0.007,-0.012 152.007,-0.012 152.007,79.988 0.007,79.988 0.007,-0.012

## Text inside footprints (layer, text, board x,y; h text height)
U01: Top Overlay "3" at 138.114,25.767 h1; Top Overlay "1" at 133.542,25.767 h1
U13: Top Overlay "3" at 20.248,38.208 h1 r270; Top Overlay "1" at 20.248,42.78 h1 r270